# EAGLE board Controller Battery Charger Board (EAGLE 8.2.1)
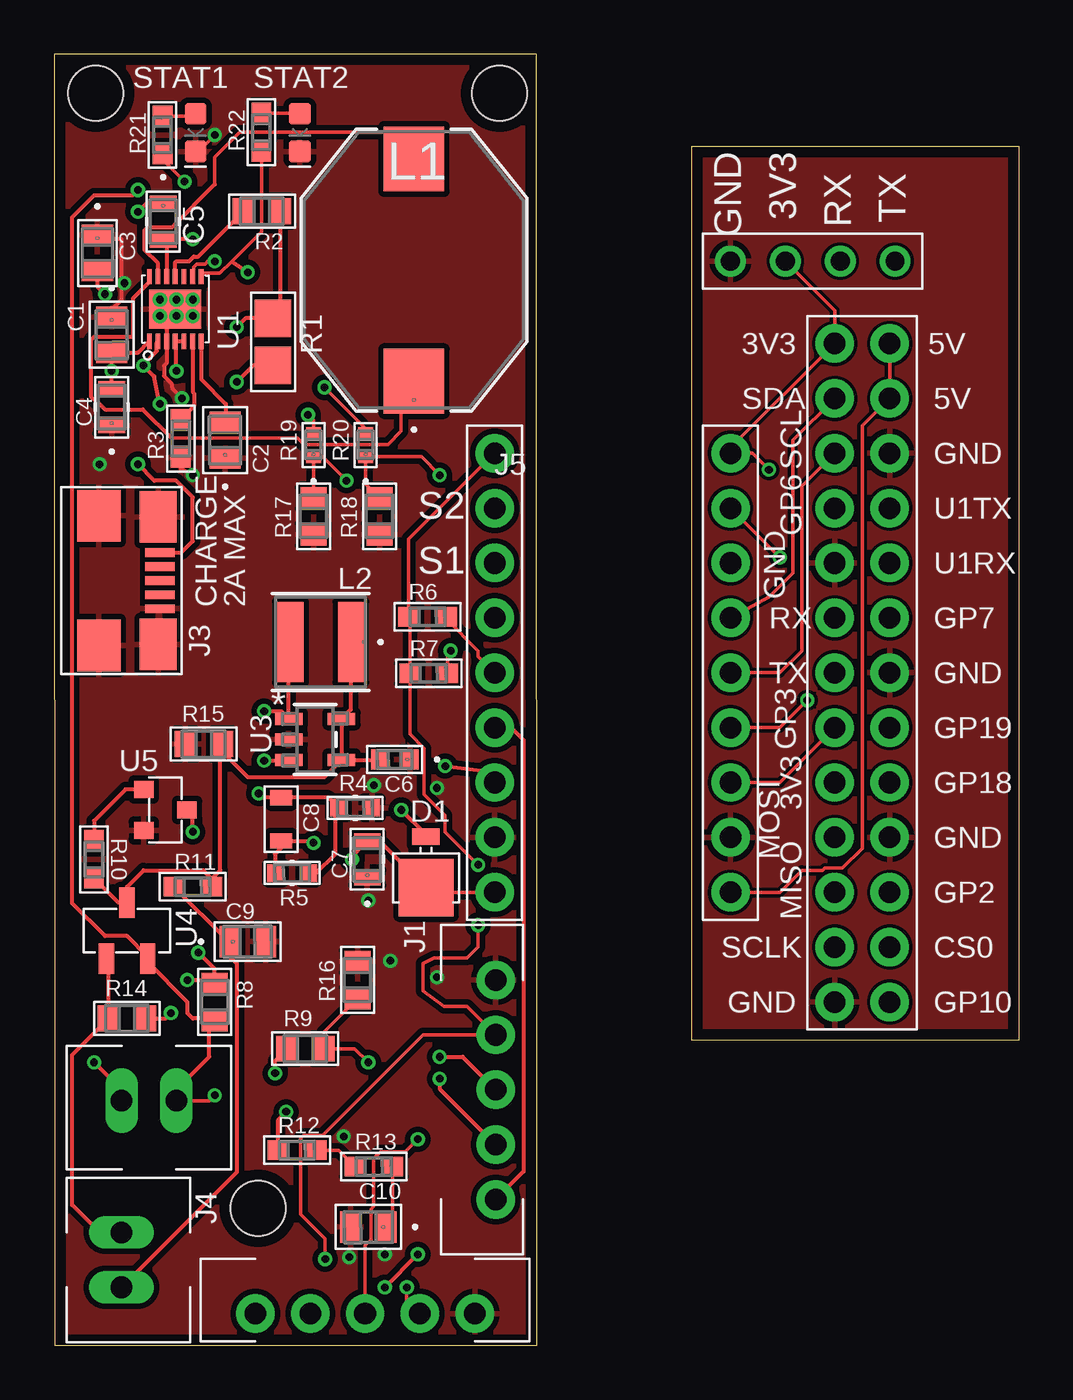
[diagram p0: board, top side]
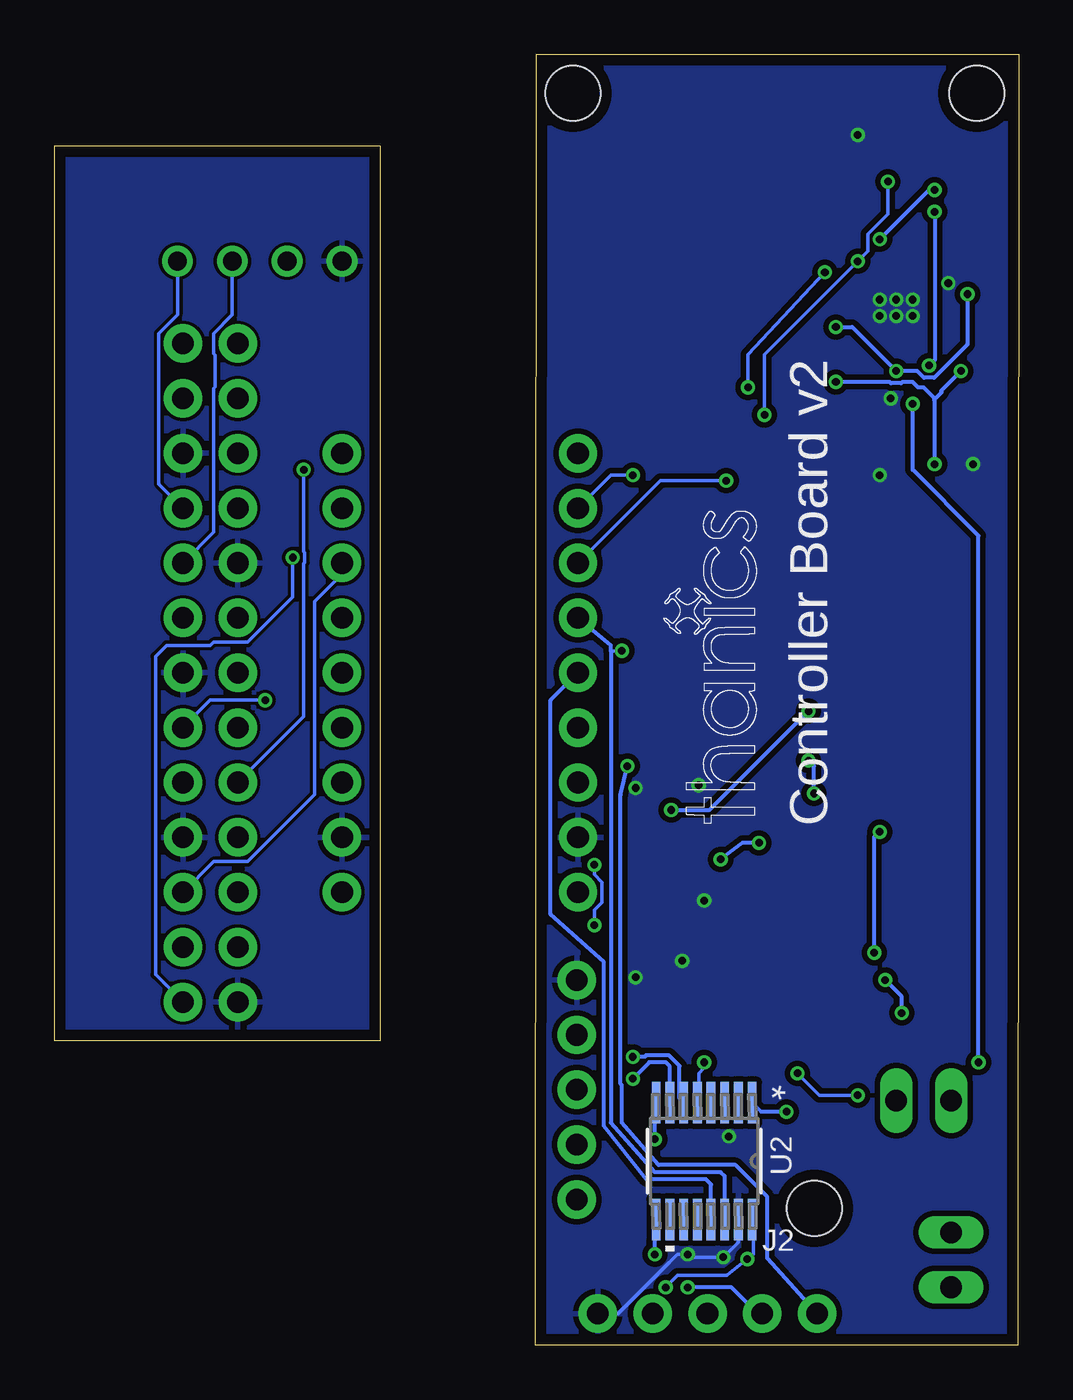
[diagram p1: board, bottom side, seen from below]

Size 44.65 x 59.78 mm. Coordinates in mm from the lower left corner, seen from the top.
Outline: 0,59.78 0.03,0 22.35,0 22.33,59.78 0,59.78
Outline: 44.65,14.12 29.54,14.12 29.54,55.52 44.65,55.52 44.65,14.12
Copper layers (1*16): Top 0.035mm / dielectric 1.6mm / Bottom 0.035mm
Design rules "Elecrow_2-layer_PCB_eagle_rule": minimum track width 6mil, minimum drill 12mil, track to track 6mil, track to pad 6mil, pad to pad 6mil, via to via 8mil, smd to smd 0mil, copper to edge 20mil, drill to drill 10mil, minimum pad ring 6mil, minimum via ring 6mil, stop-mask expansion 0mil, vias tented up to drill 100mil, thermal gap 10mil
Holes 2.54 mm at 1.93,57.96 20.62,57.96 9.45,6.35

## Footprints (pad centres in the part's own frame; a part is rotated, then mirrored left to right if it is on the bottom)
0805 = smd 0.965 x 1.448: 1 -0.826,0; 2 0.826,0
YAG_CC0805 = smd 0.965 x 1.448: 1 -0.826,0; 2 0.826,0
G-21 = smd 0.711 x 1.245: 1 -0.851,0; 2 0.851,0
G-188-M = smd 0.813 x 0.914: 1 -0.699,0; 2 0.699,0
0603_CAPACITOR = smd 0.701 x 1.001: 1 -1.001,0; 2 1.001,0
UPS5817_DIODE = smd 0.762 x 1.27: A 0,0 | smd 2.667 x 2.54: C -2.349,0
LED-0603 = smd 1 x 1: A -0.877,0; C 0.877,0
JST-XH_5POS = drill 1 pad 1.778: 1 0,5.08; 2 0,2.54; 3 0,0; 4 0,-2.54; 5 0,-5.08
USB_MICRO_B_SMT = smd 0.4 x 1.35: 1 -1.3,0; 2 -0.65,0; 3 0,0; 4 0.65,0; 5 1.3,0 | smd 2.4 x 1.7: P$1 -2.95,-0.075; P$2 2.95,-0.075 | smd 2.4 x 2: P$3 3,-2.825; P$4 -3,-2.825
XH_CONNECTOR = drill 1.001 long: 1 -1.27,0; 2 1.27,0
9_PIN_CONNECTOR = drill 1 pad 1.778: 1 -8.89,0; 2 -6.35,0; 3 -3.81,0; 4 -1.27,0; 5 1.27,0; 6 3.81,0; 7 6.35,0; 8 8.89,0; 9 11.43,0
IND_BOURNS_SRR1005 = smd 2.997 x 2.794: 1 -5.144,0; 2 5.144,0
IND_TAIYO_NR4018 = smd 1.194 x 3.708: 1 -1.397,0; 2 1.397,0
1206 = smd 1.727 x 1.676: 1 -1.092,0; 2 1.092,0
RC0805N = smd 1.006 x 1.2: 1 -0.853,0; 2 0.853,0
RC0603N-M = smd 0.965 x 0.914: 1 -0.876,0; 2 0.876,0
RC0603N = smd 0.762 x 0.813: 1 -0.775,0; 2 0.775,0
0402 = smd 0.584 x 0.686: 1 -0.546,0; 2 0.546,0
AAT3620_TDFN = smd 0.7 x 0.22: 1 -1.5,1.2; 2 -1.5,0.8; 3 -1.5,0.4; 4 -1.5,0; 5 -1.5,-0.4; 6 -1.5,-0.8; 7 -1.5,-1.2; 8 1.5,-1.2; 9 1.5,-0.8; 10 1.5,-0.4; 11 1.5,0; 12 1.5,0.4; 13 1.5,0.8; 14 1.5,1.2 | smd 1.8 x 2.4: EP 0,0
21-0055H_16-M = smd 1.905 x 0.406: 1 -2.705,2.223; 2 -2.705,1.587; 3 -2.705,0.953; 4 -2.705,0.318; 5 -2.705,-0.318; 6 -2.705,-0.953; 7 -2.705,-1.587; 8 -2.705,-2.223; 9 2.705,-2.223; 10 2.705,-1.587; 11 2.705,-0.953; 12 2.705,-0.318; 13 2.705,0.318; 14 2.705,0.953; 15 2.705,1.587; 16 2.705,2.223
MF05A = smd 1.27 x 0.559: 1 -1.219,0.953; 2 -1.219,0; 3 -1.219,-0.953; 4 1.219,-0.953; 5 1.219,0.953
SC59_MOSFET = smd 0.7 x 1.4: D 0,1.3; G -0.95,-1.3; S 0.95,-1.3
SOT-23_(TO-236AB) = smd 0.8 x 0.9: D 0,-1; G 0.95,1; S -0.95,1
ORANGE_PI_ADAPTER = drill 1 pad 1.778: P$1 0,12.7; P$2 2.54,12.7; P$3 0,10.16; P$4 2.54,10.16; P$5 0,7.62; P$6 2.54,7.62; P$7 0,5.08; P$8 2.54,5.08; P$9 0,2.54; P$10 2.54,2.54; P$11 0,0; P$12 2.54,0; P$13 0,-2.54; P$14 2.54,-2.54; P$15 0,-5.08; P$16 2.54,-5.08; P$17 0,-7.62; P$18 2.54,-7.62; P$19 0,-10.16; P$20 2.54,-10.16; P$21 0,-12.7; P$22 2.54,-12.7; P$23 0,-15.24; P$24 2.54,-15.24; P$25 0,-17.78; P$26 2.54,-17.78
4_PIN_TELE_CONNECTOR = drill 0.87 pad 1.422: 1 0,3.81; 2 0,1.27; 3 0,-1.27; 4 0,-3.81

## Placement (x,y rotation side)
C1  0.1uF  [0805]  2.67,46.79 270 top
C2  0.1uF  [0805]  7.92,41.91 90 top
C3  1uF  [YAG_CC0805]  2.01,50.57 270 top
C4  10uF  [G-21]  2.67,43.43 90 top
C5  22uF  [G-21]  5.05,52.02 270 top
C6  2.2uF  [G-188-M]  15.77,27.13 180 top
C7  10uF  [G-21]  14.5,22.5 90 top
C8  470pF  [0603_CAPACITOR]  10.52,24.36 270 top
C9  1uF  [YAG_CC0805]  8.97,18.69 0 top
C10  0.1uF  [0805]  14.55,5.49 180 top
D1  UPS5817_SCHOTTKY_DIODE  [UPS5817_DIODE]  17.22,23.55 90 top
D2  GREEN  [LED-0603]  6.55,56.15 270 top
D3  RED  [LED-0603]  11.38,56.15 270 top
J1  JOYSTICK  [JST-XH_5POS]  20.45,11.84 0 top
J2  JOYSTICK  [JST-XH_5POS]  14.4,1.47 270 top
J3  USB_MICRO_B_SMT  [USB_MICRO_B_SMT]  4.9,35.41 270 top
J4  2_PIN_CONNECTOR  [XH_CONNECTOR]  3.12,3.96 270 top
J5  RPI-AUX_BOARD_CONNECTOR  [9_PIN_CONNECTOR]  20.4,29.87 90 top
J6  POWER_CONNECTOR  [XH_CONNECTOR]  4.39,11.33 180 top
J7  RPI-AUX_BOARD_CONNECTOR  [9_PIN_CONNECTOR]  31.32,29.87 90 top
L1  4.7 uH  [IND_BOURNS_SRR1005]  16.66,49.78 90 top
L2  10uH  [IND_TAIYO_NR4018]  12.34,32.56 180 top
R1  100  [1206]  10.13,46.46 270 top
R2  10k  [RC0805N]  9.63,52.5 180 top
R3  100k  [RC0603N-M]  5.87,41.99 90 top
R4  13.3k  [RC0603N]  13.94,24.89 0 top
R5  43k  [RC0603N]  11.02,21.87 180 top
R6  1k  [RC0603N-M]  17.3,33.73 0 top
R7  1k  [RC0603N-M]  17.35,31.12 0 top
R8  10k  [RC0805N]  7.44,15.9 270 top
R9  10k  [RC0805N]  11.63,13.74 0 top
R10  100k  [RC0603N-M]  1.85,22.5 270 top
R11  1M  [RC0603N-M]  6.43,21.23 0 top
R12  1k  [RC0603N-M]  11.25,9.04 0 top
R13  1k  [RC0603N-M]  14.81,8.28 0 top
R14  10k  [RC0805N]  3.38,15.14 0 top
R15  10k  [RC0805N]  6.93,27.84 0 top
R16  10k  [RC0805N]  14.05,16.92 90 top
R17  10k  [RC0805N]  12.01,38.38 90 top
R18  10k  [RC0805N]  15.06,38.38 90 top
R19  5k  [0402]  12.01,41.68 90 top
R20  5k  [0402]  14.43,41.68 90 top
R21  1k  [RC0603N-M]  5.03,56.03 90 top
R22  1k  [RC0603N-M]  9.6,56.16 90 top
U1  AAT3620_BATT_CHARGER  [AAT3620_TDFN]  5.61,47.98 90 top
U2  8 CH  [21-0055H_16-M]  14.55,8.53 270 bottom
U3  LM27313XMF/NOPB  [MF05A]  12.09,28.05 0 top
U4  DMP3030SN_MOSFET  [SC59_MOSFET]  3.38,19.2 0 top
U5  [SOT-23_(TO-236AB)]  5.16,24.79 90 top
U$1  ORANGE_PI_ADAPTER1  [ORANGE_PI_ADAPTER]  36.14,33.68 0 top
U$3  4_PIN_TELE_CONNECTOR  [4_PIN_TELE_CONNECTOR]  35.13,50.19 270 top

## Library data of the parts
C1 C2 C10 = 0.1uF X7R Ceramic Capacitor; COPYRIGHT: Copyright C 2015 Accelerated Designs. All rights reserved; MANUFACTURER_PART_NUMBER: 08055C104KAT2A; VENDOR: Vendor
C3 C9 = 1uF X7R Ceramic Capacitor; COPYRIGHT: Copyright C 2015 Accelerated Designs. All rights reserved; MANUFACTURER_PART_NUMBER: CC0805KKX7R7BB105; VENDOR: Vendor
C4 C7 = 10uF X5R Ceramic Capacitor; COPYRIGHT: Copyright C 2015 Accelerated Designs. All rights reserved; MANUFACTURER_PART_NUMBER: GRM21BR60J106ME19L; VENDOR: Vendor
C5 = 22uF X5R Ceramic Capacitor; COPYRIGHT: Copyright C 2015 Accelerated Designs. All rights reserved; MANUFACTURER_PART_NUMBER: GRM21BR60J226ME39L; VENDOR: Vendor
C6 = 2.2uF X5R Capacitor; COPYRIGHT: Copyright C 2015 Accelerated Designs. All rights reserved; MANUFACTURER_PART_NUMBER: GRM188R61C225KE15J; VENDOR: Vendor
C8 D1 J1-J7 R1 U1 U4 U5 U$1 U$3 = thanics_robotics
D2 D3 = SparkFun-LED; PROD_ID: DIO-00821
L1 = 4.7 uH Inductor; COPYRIGHT: Copyright C 2015 Accelerated Designs. All rights reserved; MANUFACTURER_PART_NUMBER: SRR10054R7M; VENDOR: Bourns Electronics
L2 = 10uH-inductor; COPYRIGHT: Copyright C 2015 Accelerated Designs. All rights reserved; MANUFACTURER_PART_NUMBER: NR4018T100M; VENDOR: TAIYO YUDEN
R2 R8 R9 R14-R18 = 10k-resistor; CASE: 0805 2012 metric; COMPOSITION: Thin Film; COPYRIGHT: Copyright C 2015 Accelerated Designs. All rights reserved; DATASHEET: httpindustrial.panasonic.comwwwcgijvcr13pz.cgi?E+PZ+3+AOA0026+ERA6AEB103V+7+WW; DIGIKEYPARTNUMBER: P10KDATRND; HEIGHT: 0.024" 0.60mm; LEADSTYLE: Surface Mount SMD SMT; MANUFACTURER_PART_NUMBER: ERA6AEB103V; NUMBEROFTERMINATIONS: 2; PACKAGECASE: 0805 2012 Metric; PACKAGING: Tape &amp Reel TR; POWERWATTS: 0.125W 18W; QUANTITY_AVAILABLE: 225000; RESISTANCEINOHMS: 10.0K; RESISTANCEOHMS: 10K; SIZEDIMENSION: 0.079" L x 0.049" W 2.00mm x 1.25mm; TEMPERATURECOEFFICIENT: 25ppm°C; TOLERANCE: 0.1%; VENDOR: Panasonic; VOLTAGEWORKING: 100V
R3 R10 = 100k-resistor; MANUFACTURER_PART_NUMBER: RC0603JR07100KL; VENDOR: Yageo
R4 = 13.3k-resistor; CASE: 0603 1608 metric; COMPOSITION: Thick Film; COPYRIGHT: Copyright C 2015 Accelerated Designs. All rights reserved; DATASHEET: httpwww.yageo.comdocumentsrecentPYuRC0603_51_RoHS_L_4.pdf; DESCRIPTION: RES 13.3K OHM 110W 1% 0603 SMD; DIGIKEYPARTNUMBER: 31113.3KHRTRND; HEIGHT: 0.022" 0.55mm; LEADSTYLE: Surface Mount SMD SMT; MANUFACTURER_PART_NUMBER: RC0603FR0713K3L; NEWARKPARTNUMBER: 13P0479; NUMBEROFTERMINATIONS: 2; PACKAGECASE: 0603 1608 Metric; PACKAGING: Tape &amp Reel TR; POWERWATTS: 0.1W 110W; QUANTITY_AVAILABLE: 205000; RESISTANCEINOHMS: 13.3K; RESISTANCEOHMS: 13.3K; SIZEDIMENSION: 0.063" L x 0.031" W 1.60mm x 0.80mm; TEMPERATURECOEFFICIENT: 100ppm°C; TOLERANCE: 1%; VENDOR: Yageo; VOLTAGEWORKING: 50V
R5 = 43k-resistor; CASE: 0603 1608 metric; COMPOSITION: Thick Film; COPYRIGHT: Copyright C 2015 Accelerated Designs. All rights reserved; DATASHEET: httpwww.yageo.comdocumentsrecentPYuRC0603_51_RoHS_L_4.pdf; DESCRIPTION: RES 43.0K OHM 110W 1% 0603 SMD; DIGIKEYPARTNUMBER: 31143.0KHRTRND; HEIGHT: 0.022" 0.55mm; LEADSTYLE: Surface Mount SMD SMT; MANUFACTURER_PART_NUMBER: RC0603FR0743KL; NEWARKPARTNUMBER: 66R2397; NUMBEROFTERMINATIONS: 2; PACKAGECASE: 0603 1608 Metric; PACKAGING: Tape &amp Reel TR; POWERWATTS: 0.1W 110W; QUANTITY_AVAILABLE: 35000; RESISTANCEINOHMS: 43.0K; RESISTANCEOHMS: 43K; SIZEDIMENSION: 0.063" L x 0.031" W 1.60mm x 0.80mm; TEMPERATURECOEFFICIENT: 100ppm°C; TOLERANCE: 1%; VENDOR: Yageo; VOLTAGEWORKING: 50V
R6 R7 R12 R13 R21 R22 = 1k-resistor; CASE: 0603 1608 metric; COMPOSITION: Thick Film; COPYRIGHT: Copyright C 2015 Accelerated Designs. All rights reserved; DATASHEET: httpwww.yageo.comdocumentsrecentPYuRC0603_51_RoHS_L_4.pdf; DESCRIPTION: RES 1.0K OHM 110W 5% 0603 SMD; DIGIKEYPARTNUMBER: 3111.0KGRTRND; HEIGHT: 0.022" 0.55mm; LEADSTYLE: Surface Mount SMD SMT; MANUFACTURER_PART_NUMBER: RC0603JR071KL; NEWARKPARTNUMBER: 14M7231; NUMBEROFTERMINATIONS: 2; PACKAGECASE: 0603 1608 Metric; PACKAGING: Tape &amp Reel TR; POWERWATTS: 0.1W 110W; QUANTITY_AVAILABLE: 0; RESISTANCEINOHMS: 1.00K; RESISTANCEOHMS: 1K; SIZEDIMENSION: 0.063" L x 0.031" W 1.60mm x 0.80mm; TEMPERATURECOEFFICIENT: 100ppm°C; TOLERANCE: 5%; VENDOR: Yageo; VOLTAGEWORKING: 50V
R11 = 1M-resistor; MANUFACTURER_PART_NUMBER: RC0603JR071ML; VENDOR: Yageo
R19 R20 = 5k-resistor; COPYRIGHT: Copyright C 2015 Accelerated Designs. All rights reserved; MANUFACTURER_PART_NUMBER: PNM0402E5001BST1; VENDOR: Vendor
U2 = 8ch ADC; COPYRIGHT: Copyright C 2015 Accelerated Designs. All rights reserved; DATAINTERFACE: I²C Serial; DATASHEET: httpdatasheets.maximic.comendsMAX11606MAX11611.pdf; DESCRIPTION: IC ADC SERIAL 10BIT 8CH 16QSOP; DIGIKEYPARTNUMBER: MAX11608EEE+ND; MANUFACTURER_PART_NUMBER: MAX11608EEE+; MOUNTINGTYPE: Surface Mount; NUMBEROFBITS: 10; NUMBEROFCONVERTERS: 1; NUMBEROFINPUTSANDTYPE: 8 SingleEnded Unipolar 8 SingleEnded Bipolar 4 Differential Unipolar 4 Differential Bipolar; OPERATINGTEMPERATURE: 40°C ~ 85°C; PACKAGECASE: 16SSOP 0.154" 3.90mm Width; PACKAGING: Tube; POWERDISSIPATIONMAX: 666.7mW; QUANTITY_AVAILABLE: 814; SAMPLINGRATEPERSECOND: 94.4k; SUPPLIERDEVICEPACKAGE: 16QSOP; VENDOR: Maxim Integrated Products; VOLTAGESUPPLYSOURCE: Single Supply
U3 = boost-converter; 3D_LIBRARY_NAME: National_Switchers; BASE_PN: LM27313; COMPTYPE: Switcher; COMPTYPE2: Switcher; COPYRIGHT: Copyright C 2015 Accelerated Designs. All rights reserved; MANUFACTURER_PART_NUMBER: LM27313XMFNOPB; SYMBOL: NameLM27313XMF; TYPE: LM27313XMF; VENDOR: National Semiconductor; VENDOR2: NationalSemiconductor; VERSION: 05022007; VERSION2: 1

## Nets
+3V3: J1.2 J2.2 J5.9 R6.1 R7.1 U2.16
+5V: C7.2 C8.2 D1.C J5.1 R5.2
GND: C1.1 C2.1 C3.1 C4.1 C6.1 C7.1 C9.2 C10.2 D2.C D3.C J1.1 J2.1 J3.5 J3.P$1 J3.P$2 J3.P$3 J3.P$4 J5.2 R3.1 R4.2 R15.1 R16.2 R17.1 R18.1 U1.3 U1.EP U2.15 U3.2 U5.S
GNDA: J7.2 U$1.P$6 U$1.P$9 U$1.P$14 U$1.P$20 U$1.P$25 U$3.4
N$1: J4.1 R14.1 U4.G
N$2: C2.2 U1.7
N$3: R3.2 U1.6
N$4: L1.2 U1.13
N$5: L1.1 U1.14
N$6: C3.2 R1.1 R2.1 U1.4 U1.5
N$7: C5.2 J6.1 R8.2 R9.1 U1.12 U4.S
N$8: C8.1 R4.1 R5.1 U3.3
N$9: J5.7 R17.2 R19.1
N$10: J5.8 R18.2 R20.1
N$11: R2.2 U1.11
N$12: D1.A L2.2 U3.1
N$13: J7.1 U$1.P$2 U$1.P$4
N$14: J5.6 R7.2 U2.14
N$15: J1.5 J5.4
N$16: R12.1 U2.1
N$17: J1.3 U2.6
N$18: J1.4 U2.7
N$19: J2.3 U2.8
N$20: J2.4 U2.9
N$21: J5.5 R6.2 U2.13
N$22: J2.5 J5.3
N$23: C6.2 L2.1 R10.2 R11.2 R15.2 U3.4 U3.5 U4.D
N$24: R12.2 R13.1
N$25: R10.1 U5.G
N$26: C9.1 J4.2 R11.1
N$27: R8.1 R14.2 U5.D
N$28: C10.1 R13.2
N$29: J7.8 U$1.P$26
N$30: J7.7 U$1.P$22
N$31: J7.6 U$1.P$3
N$32: J7.5 U$1.P$5
N$33: C5.1 J6.2 U1.2
N$34: J7.4 U$1.P$16
N$35: J7.3 U$1.P$15
N$36: U$1.P$8 U$3.1
N$37: U$1.P$10 U$3.2
N$39: R9.2 R16.1 U2.5
N$40: R20.2 R22.1 U1.8
N$41: J7.9 U$1.P$1 U$1.P$17 U$3.3
N$42: D2.A R21.2
N$43: D3.A R22.2
N$45: R19.2 R21.1 U1.9
USB_5V: C1.2 C4.2 J3.1 R1.2 U1.1

## Tracks (layer width: path | path; a pad name or v marks a point on that pad's centre or on a via)
+3V3  (via drill 0.35)
  Top 0.152: J5.9 16.42,37.33 R6.1 16.47,33.68 R7.1 16.47,28.31 17.14,27.64 17.14,25.5 18.11,24.54 18.11,23.77 v19.63,22.25 | v16.33,2.69 16.33,2.08 J2.2 | v19.63,19.46 19.63,18.44 19.13,17.93 17.6,17.93 17.09,17.68 17.09,16.41 18.06,15.7 19.13,15.7 J1.2 17.09,14.38 12.45,9.73 11.55,9.73 11.42,9.59 11.42,6.07 12.56,4.93 v12.56,4
  Bottom 0.152: v16.33,2.69 16.13,2.9 16.13,2.92 15.8,3.25 13.51,3.25 v12.56,4 12.28,4.22 12.28,5.63 U2.16 | v19.63,22.25 19.63,21.8 19.28,21.44 19.28,20.52 19.63,20.16 v19.63,19.46
+5V  (via drill 0.35)
  Top 0.152: J5.1 17.44,20.98 D1.C | C7.2 15.06,23.36
  Top 0.178: 15.06,23.36 D1.C | R5.2 10.24,21.88 10.24,22.76 10.52,23.04 C8.2 11.92,23.36 v12.01,23.27 | v13.79,22.5 13.65,22.5 C7.2
  Bottom 0.178: v12.01,23.27 12.78,23.27 v13.79,22.5
GND  (via drill 0.35)
  Top 0.152: D2.C 6.68,55.27 v7.44,56.03
  Top 0.178: U1.EP 5.21,47.58 U1.3 5.21,45.46 5.1,45.35 5.1,44.87 5.43,44.54 5.47,44.29 v5.92,43.84 | C1.1 2.67,47.96 3.12,48.41 3.12,51.21 2.2,51.21 C3.1 | R3.1 5.87,40.59 v6.43,40.28
  Bottom 0.152: U2.15 12.97,4.79 v13.67,4.09 15.19,4.09 v15.32,4.22 15.8,4.22 16.2,3.81 | 18.54,1.47 J2.1
  Bottom 0.178: 16.2,3.81 18.54,1.47 | 13.03,5.77 U2.15
  other vias: 4.9,48.41 5.66,48.41 6.43,48.41 6.43,47.65 5.66,47.65 4.9,47.65 2.11,40.79 3.25,49.17 14.81,25.93 14.55,20.6 17.73,25.81 15.57,17.81 17.73,17.04 13.41,9.68
  pour Bottom (isolate 0.254): 22.3,59.82 22.3,0.15 0.03,0.03 0.03,59.82
  pour Top (isolate 0.254, rank 2): 0.05,59.84 22.3,59.84 22.43,18.47 22.25,0.13 -0.03,0.23
GNDA
  pour Top: 29.54,14.12 44.65,14.12 44.65,55.52 29.54,55.52
  pour Bottom: 29.54,14.12 44.65,14.12 44.65,55.52 29.54,55.52
N$1
  Top 0.178: U4.G 2.53,17.8 R14.1 0.84,13.45 0.84,6.5 2.11,5.23 J4.1
N$2
  Top 0.178: U1.7 6.81,44.72 7.95,43.59 7.95,42.76 C2.2
N$3
  Top 0.178: U1.6 6.43,46.47 6.43,44.14 6.49,44.08 6.49,43.48 R3.2
N$4
  Top 0.152: 7.44,53.75 7.44,55.02 8.59,56.16 15.43,56.16 L1.2
  Top 0.178: 7.44,53.75 5.46,51.77 4.33,51.77 4.19,51.62 4.19,50.71 4.81,50.09 U1.13
N$5
  Top 0.152: 5.44,42.01 11.27,42.01 11.58,41.71 15.47,41.71 16.08,42.32 16.08,44.06 L1.1
  Top 0.178: U1.14 4.41,49.22 3.65,48.46 3.65,46.69 1.84,46.69 1.7,46.54 1.7,45.38 1.7,43.93 1.95,43.69 2.01,43.69 2.36,43.33 4.12,43.33 5.44,42.01
N$6  (via drill 0.35)
  Top 0.178: v8.46,47.14 8.86,47.55 R1.1 10.48,47.89 R2.1 | v5.66,45.11 5.66,46.43 U1.4 U1.5 | C3.2 2.01,49.02 v2.36,48.67
  Bottom 0.178: v8.46,47.14 7.7,47.14 v5.66,45.11 4.69,45.11 4.38,44.8 3.9,44.8 2.36,46.34 v2.36,48.67
N$7  (via drill 0.35)
  Top 0.152: J6.1 7.19,11.33 v7.44,11.58 | v10.24,12.6 10.24,13.2 R9.1
  Top 0.178: 7.35,15.14 6.43,15.14 6.17,15.39 6.17,15.9 4.33,17.74 U4.S 4.33,18 3.38,18.95 2.36,18.95 0.84,20.47 0.84,31.11 0.84,49.62 0.84,52.22 1.85,53.24 3.63,53.24 v3.89,53.49 | 7.35,15.14 R8.2 | J6.1 5.66,11.84 7.19,13.36 7.19,14.98 7.35,15.14 | 5.21,51.01 U1.12 | 5.21,51.01 C5.2 | v6.43,51.21 5.41,51.21 5.21,51.01
  Bottom 0.152: v7.44,11.58 9.22,11.58 v10.24,12.6
  Bottom 0.178: v3.89,53.49 4.14,53.49 v6.43,51.21
N$8  (via drill 0.35)
  Top 0.178: R5.1 12.14,21.87 13.03,22.76 13.03,24.75 R4.1 12.7,25.36 C8.1 9.67,25.36 v9.47,25.55 | v9.73,27.08 10.85,27.08 U3.3
  Bottom 0.178: v9.47,25.55 9.47,26.82 v9.73,27.08
N$9  (via drill 0.35)
  Top 0.152: R17.2 R19.1 12.43,41.14 v13.54,40.03
  Bottom 0.152: v13.54,40.03 16.59,40.03 J5.7
N$10  (via drill 0.35)
  Top 0.152: R18.2 14.43,39.87 R20.1 17.01,41.14 v17.86,40.28
  Bottom 0.152: v17.86,40.28 18.87,40.28 J5.8
N$11
  Top 0.178: U1.11 5.61,50.14 5.66,50.19 6.26,50.19 6.47,50.4 6.67,50.4 R2.2
N$12  (via drill 0.35)
  Top 0.178: L2.2 10.87,32.49 U3.1 10.52,29.36 v9.73,29.36 | D1.A 17.22,23.65 v16.08,24.79
  Bottom 0.178: v16.08,24.79 14.3,24.79 v9.73,29.36
N$13
  Top 0.152: J7.1 33.6,20.98 34.62,22 35.58,22 35.68,22.1 36.5,22.1 37.41,23.01 37.41,42.57 U$1.P$4 U$1.P$2
N$14  (via drill 0.35)
  Top 0.152: R7.2 18.22,32.02 v18.36,32.16
  Bottom 0.152: v18.36,32.16 18.87,32.16
  Bottom 0.178: U2.14 13.6,7.84 13.79,8.03 16.84,8.03 18.87,10.31 18.87,32.16 18.87,32.41 J5.6
N$15
  Top 0.178: J5.4 21.16,28.6 21.67,28.09 21.74,28.02 21.74,8.05 J1.5
N$16  (via drill 0.35)
  Top 0.178: R12.1 10.38,10.45 v10.74,10.82
  Bottom 0.152: 11.91,10.82 U2.1
  Bottom 0.178: v10.74,10.82 11.91,10.82
N$17  (via drill 0.35)
  Top 0.178: v17.86,13.36 18.92,13.36 J1.3
  Bottom 0.178: U2.6 15.7,11.43 15.7,12.94 16.2,13.44 17.23,13.44 17.31,13.36 v17.86,13.36
N$18  (via drill 0.35)
  Top 0.178: v17.86,12.34 17.86,11.89 J1.4
  Bottom 0.178: U2.7 16.14,12.92 16.33,13.11 17.09,13.11 v17.86,12.34
N$19  (via drill 0.35)
  Top 0.152: J2.3 14.4,4.63 14.67,4.9 14.67,6.31 14.8,6.44 14.8,8.66 15.11,8.97 16.26,8.97 v16.84,9.55
  Bottom 0.178: v16.84,9.55 16.84,11.18 U2.8
N$20  (via drill 0.35)
  Top 0.178: v15.32,2.69 v16.84,4.22
  Bottom 0.178: J2.4 12.07,1.47 13.28,2.69 v15.32,2.69 | v16.84,4.22 16.84,5.77 U2.9
N$21
  Top 0.152: R6.2 18.17,33.62 19.63,32.16 19.63,31.9 J5.5
  Bottom 0.178: U2.13 14.24,7.46 14.48,7.7 17.23,7.7 19.2,10.18 19.2,15.65 19.2,17.75 21.67,19.96 21.67,29.87 J5.5
N$22  (via drill 0.35)
  Top 0.178: v18.11,26.82 20.14,26.57 J5.3
  Bottom 0.178: J2.5 11.63,4.04 11.63,6.88 13.11,8.36 16.66,8.36 18.36,10.31 18.36,12.05 18.43,12.11 18.43,25.49 v18.11,26.82
N$23
  Top 0.178: R10.2 2.98,20.5 U4.D 3.38,21.23 4.14,22 6.91,22 7.3,21.6 | 7.3,21.6 R11.2 | 7.3,21.6 7.7,22 7.7,27.75 R15.2 7.79,27.49 8.97,26.31 12.52,26.31 U3.4 | U3.4 U3.5 13.74,29.44 L2.1 | U3.4 15.05,27.1 C6.2
N$24
  Top 0.152: R12.2 13.17,9.04 R13.1
N$25
  Top 0.178: U5.G 3.31,25.74 1.85,24.28 R10.1
N$26
  Top 0.178: R11.1 8.09,18.69 C9.1 8.14,18 8.46,17.68 8.46,8.03 J4.2
N$27  (via drill 0.35)
  Top 0.178: R14.2 5.16,15.14 v5.41,15.39 | v6.17,16.92 7.28,16.92 R8.1 7.44,17.42 v6.68,18.19 | v6.43,23.77 6.43,24.52 U5.D
  Bottom 0.178: v5.41,15.39 5.41,16.15 v6.17,16.92 | v6.68,18.19 6.68,23.52 v6.43,23.77
N$28
  Top 0.152: R13.2 15.68,5.79 C10.1
N$29  (via drill 0.35)
  Top 0.152: J7.8 v33.6,36.47
  Bottom 0.152: v33.6,36.47 33.6,34.64 35.68,32.56 37.26,32.56 37.41,32.41 39.45,32.41 39.95,31.9 39.95,17.17 U$1.P$26
N$30
  Bottom 0.152: J7.7 31.32,35.71 32.59,34.44 32.59,25.5 35.68,22.4 37.26,22.4 U$1.P$22
N$31
  Top 0.152: J7.6 33.1,34.64 34.21,35.76 34.21,41.91 U$1.P$3
N$32
  Top 0.152: J7.5 33.6,31.14 34.62,32.16 34.62,39.78 U$1.P$5
N$33  (via drill 0.35)
  Top 0.178: C5.1 4.28,52.87 v3.89,52.48 | U1.2 4.76,46.43 4.76,46.03 4.14,45.41 v4.14,45.36 4.65,44.86 v4.9,43.59 | J6.2 3.12,11.84 v1.85,13.11
  Bottom 0.178: v3.89,52.48 3.89,45.62 v4.14,45.36 | v1.85,13.11 1.85,37.49 4.9,40.54 v4.9,43.59
N$34  (via drill 0.35)
  Top 0.152: J7.4 33.6,28.6 v34.87,29.87
  Bottom 0.152: v34.87,29.87 37.41,29.87 U$1.P$16
N$35
  Top 0.152: J7.3 33.6,26.06 U$1.P$15
N$36
  Bottom 0.152: U$3.1 38.94,47.71 39.8,46.84 39.8,39.88 U$1.P$8
N$37
  Bottom 0.152: U$3.2 36.4,47.71 37.26,46.84 37.26,45.92 37.19,45.84 37.19,44.38 37.26,44.3 37.26,37.64 U$1.P$10
N$39  (via drill 0.35)
  Top 0.152: R16.1 12.49,14.5 R9.2 13.92,13.74 v14.55,13.11
  Bottom 0.152: v14.55,13.11 14.55,12.85 14.81,12.6 14.81,11.3 U2.5
N$40  (via drill 0.35)
  Top 0.152: U1.8 6.97,49.63 7.67,49.63 8.22,50.18 | R22.1 9.6,51.56 8.22,50.18 | R20.2 14.43,42.44 v12.52,44.35 | v8.97,49.68 8.22,50.18
  Bottom 0.152: v12.52,44.35 12.52,45.87 v8.97,49.68
N$41  (via drill 0.35)
  Top 0.152: U$3.3 36.14,47.9 U$1.P$1 31.32,41.55 J7.9 32.33,41.3 v33.1,40.54
  Bottom 0.152: U$1.P$17 33.1,29.11 33.1,36.2 33.05,36.24 33.05,36.7 33.1,36.75 v33.1,40.54
N$42
  Top 0.152: R21.2 6.44,56.91 D2.A
N$43
  Top 0.152: R22.2 D3.A
N$45  (via drill 0.35)
  Top 0.152: R21.1 5.03,54.89 v6.05,53.87 | v7.44,50.19 7.12,50.19 6.99,50.06 6.61,50.06 6.48,49.93 6.48,49.54 U1.9 | R19.2 12.01,42.82 v11.76,43.08
  Bottom 0.152: v6.05,53.87 6.05,52.37 6.98,51.44 6.98,50.65 v7.44,50.19 11.76,45.87 v11.76,43.08
USB_5V  (via drill 0.35)
  Top 0.178: U1.1 3.89,45.96 C1.2 v2.67,45.11 C4.2 | R1.2 9.22,45.36 v8.46,44.6 | v3.89,40.79 4.65,40.03 5.66,40.03 6.43,39.27 6.43,37.24 5.9,36.71 J3.1
  Bottom 0.178: v8.46,44.6 5.96,44.6 5.9,44.54 5.43,44.54 5.37,44.6 4.9,44.6 4.65,44.35 4.39,44.35 3.9,43.86 3.9,43.78 | 3.9,43.78 3.57,44.11 3.57,44.21 v2.67,45.11 | v3.89,40.79 3.89,43.76 3.9,43.78

## Text on the board
tPlace: CHARGE | 2A MAX
tNames: STAT1 | STAT2 | L1 | U1 | 3V3 | 5V | SDA | 5V | J5 | SCL | GND | S2 | U1TX | GND | GP6 | S1 | U1RX | L2 | J3 | RX | GP7 | TX | GND | U5 | U3 | GP3 | GP19 | D1 | GP18 | 3V3 | MOSI | GND | GP2 | J1 | MISO | U4 | SCLK | CS0 | GND | GP10 | J4
bNames: Controller Board v2 | U2 | J2
Reference: STAT2 | USB Micro B | STAT1 | SDA | SCL | J1-SW | J2-SW | GND | 5V | Battery | 4.2V | SWITCH | GND